# EAGLE board avr_saber.job (EAGLE 6.5.0)
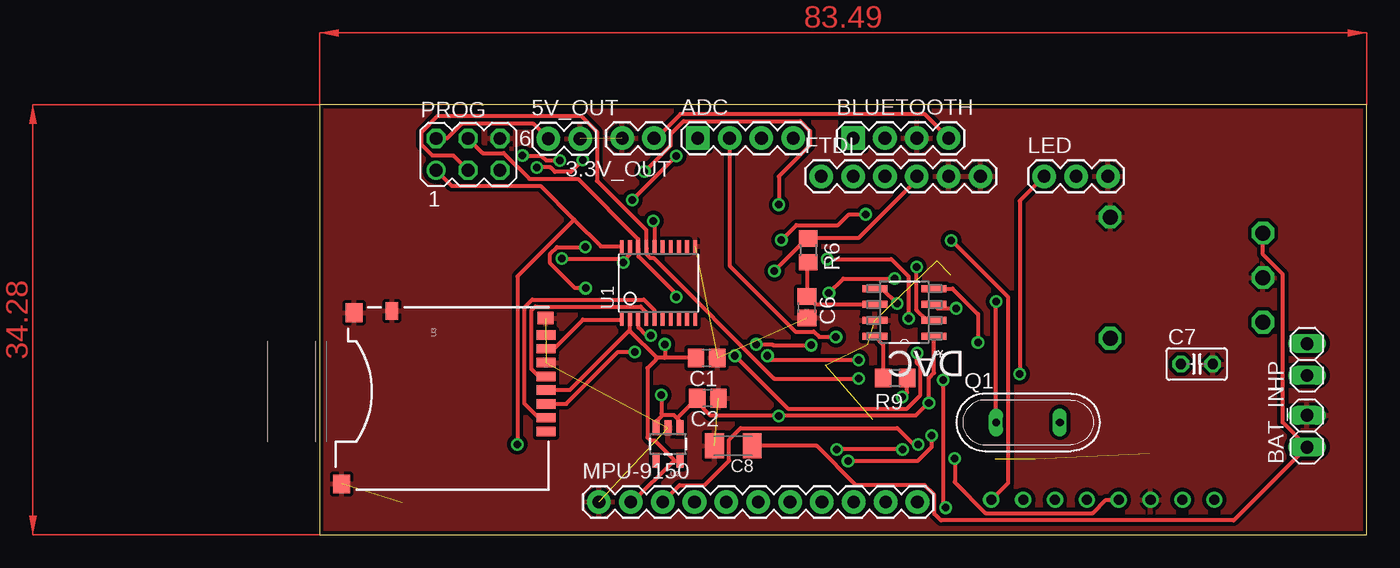
[diagram p0: board, top side]
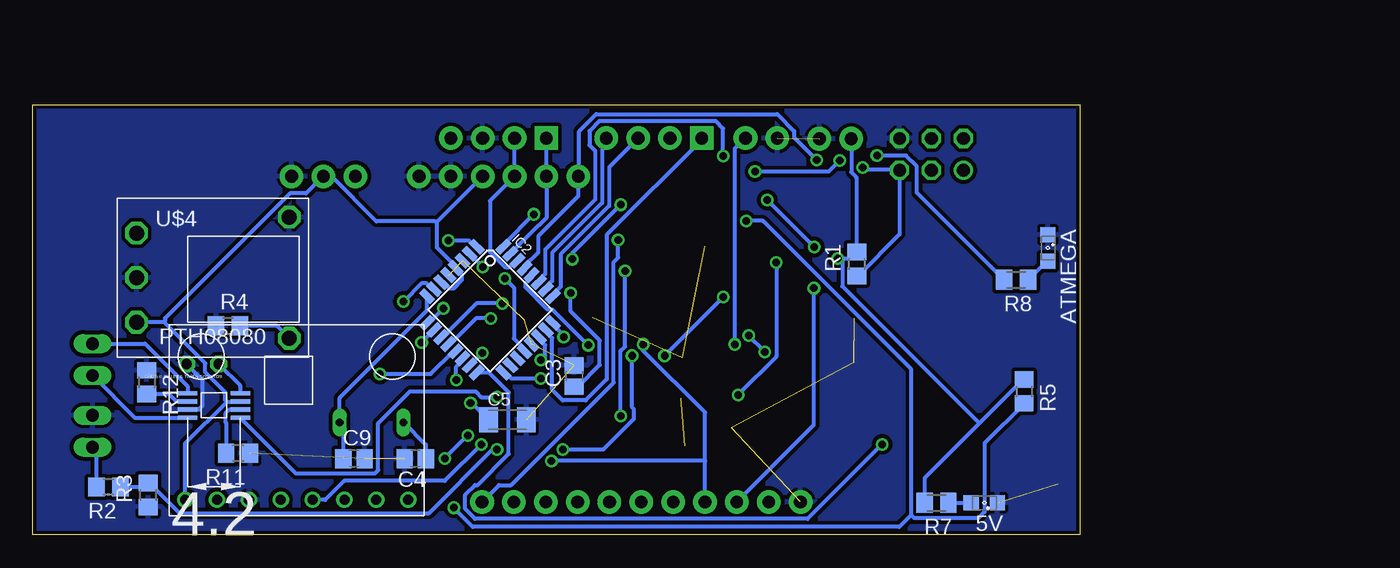
[diagram p1: board, bottom side, seen from below]

Size 83.49 x 34.28 mm. Coordinates in mm from the lower left corner, seen from the top.
Outline: 0,0 83.49,0 83.49,34.28 0,34.28 0,0
Copper layers (1*16): Top 0.035mm / dielectric 1.5mm / Bottom 0.035mm
Design rules "default *": minimum track width 12mil, minimum drill 0.6mm, track to track 10mil, track to pad 10mil, pad to pad 10mil, via to via 10mil, smd to smd 8mil, copper to edge 12mil, drill to drill 10mil, minimum pad ring 10mil, minimum via ring 8mil, stop-mask expansion 4mil, vias tented up to drill 0mil, thermal gap 10mil
Net classes: 1 power: width 0.508 mm
tKeepout: area 52.9,7.6 to 60.5,10.5

## Footprints (pad centres in the part's own frame; a part is rotated, then mirrored left to right if it is on the bottom)
1X02 = drill 1.016 pad 1.88: 1 0,0; 2 2.54,0
SML0805 = smd 1.2 x 1.2: A 1.05,0; C -1.05,0
1X04 = drill 1.016 pad 1.88 square: 1 0,0 | drill 1.016 pad 1.88: 2 2.54,0; 3 5.08,0; 4 7.62,0
1X02' = drill 1.016 long: 1 -1.27,0; 2 1.27,0
C0805 = smd 1.3 x 1.5: 1 -0.85,0; 2 0.85,0
C1206K = smd 1.5 x 2: 1 -1.5,0; 2 1.5,0
C025-025X050 = drill 0.813 octagon: 1 -1.27,0; 2 1.27,0
SOIC8-N_MC = smd 1.981 x 0.559: 1 -2.362,1.905; 2 -2.362,0.635; 3 -2.362,-0.635; 4 -2.362,-1.905; 5 2.362,-1.905; 6 2.362,-0.635; 7 2.362,0.635; 8 2.362,1.905
1X06 = drill 1.016 pad 1.88: 1 0,0; 2 2.54,0; 3 5.08,0; 4 7.62,0; 5 10.16,0; 6 12.7,0
TQFP32-08 = smd 1.27 x 0.559: 1 -4.293,2.8; 2 -4.293,2; 3 -4.293,1.2; 4 -4.293,0.4; 5 -4.293,-0.4; 6 -4.293,-1.2; 7 -4.293,-2; 8 -4.293,-2.8; 17 4.293,-2.8; 18 4.293,-2; 19 4.293,-1.2; 20 4.293,-0.4; 21 4.293,0.4; 22 4.293,1.2; 23 4.293,2; 24 4.293,2.8 | smd 0.559 x 1.27: 9 -2.8,-4.293; 10 -2,-4.293; 11 -1.2,-4.293; 12 -0.4,-4.293; 13 0.4,-4.293; 14 1.2,-4.293; 15 2,-4.293; 16 2.8,-4.293; 25 2.8,4.293; 26 2,4.293; 27 1.2,4.293; 28 0.4,4.293; 29 -0.4,4.293; 30 -1.2,4.293; 31 -2,4.293; 32 -2.8,4.293
1X03 = drill 1.016 pad 1.88: 1 0,0; 2 2.54,0; 3 5.08,0
MMA8451 = drill 0.8: 3.3V -7.62,6.35; GND -7.62,3.81; INT1 -7.62,-8.89; INT2 -7.62,-6.35; SA0 -7.62,-3.81; SCL -7.62,1.27; SDA -7.62,-1.27; VCC_IN -7.62,8.89
1X11 = drill 1.016 pad 1.88: 1 0,0; 2 2.54,0; 3 5.08,0; 4 7.62,0; 5 10.16,0; 6 12.7,0; 7 15.24,0; 8 17.78,0; 9 20.32,0; 10 22.86,0; 11 25.4,0
MA03-2 = drill 1.016: 1 -2.54,-1.27 | drill 1.016 octagon: 2 -2.54,1.27; 3 0,-1.27; 4 0,1.27; 5 2.54,-1.27; 6 2.54,1.27
QS = drill 0.61 long: 1 -2.54,0; 2 2.54,0
R0805 = smd 1.3 x 1.5: 1 -0.95,0; 2 0.95,0
M0805 = smd 1.3 x 1.6: 1 -0.95,0; 2 0.95,0
TSSOP20 = smd 0.305 x 0.991: 1 -2.925,-2.918; 2 -2.275,-2.918; 3 -1.625,-2.918; 4 -0.975,-2.918; 5 -0.325,-2.918; 6 0.325,-2.918; 7 0.975,-2.918; 8 1.625,-2.918; 9 2.275,-2.918; 10 2.925,-2.918; 11 2.925,2.918; 12 2.275,2.918; 13 1.625,2.918; 14 0.975,2.918; 15 0.325,2.918; 16 -0.325,2.918; 17 -0.975,2.918; 18 -1.625,2.918; 19 -2.275,2.918; 20 -2.925,2.918
SOT23-5 = smd 0.55 x 1.2: 1 -0.95,-1.3; 2 0,-1.3; 3 0.95,-1.3; 4 0.95,1.3; 5 -0.95,1.3
USD-SOCKET-PP = smd 0.75 x 1.5: 1 3.2,16.8; 2 2.1,16.8; 3 1,16.8; 4 -0.1,16.8; 5 -1.2,16.8; 6 -2.3,16.8; 7 -3.4,16.8; 8 -4.5,16.8 | smd 1 x 1.3: CD1 -5.85,16.75 | smd 1.4 x 1: CD2 -6.425,4.5 | smd 1.5 x 1.35: GND1 -6.275,1.475; GND2 7.375,0.475
TPA0211 = smd 1.55 x 0.35: BYPASS -2.1,-1.15; GND 2.1,0.15; IN -2.1,0.8; SE 2.1,-0.5; SHUTDOWN -2.1,0.15; VDD -2.1,-0.5; VO+ 2.1,-1.15; VO- 2.1,0.8
PTH08080EUF = drill 1.2 octagon: 1 0,0; 2 0,-3.556; 3 0,-7.112; 4 12.192,-8.382; 5 12.192,1.27

## Placement (x,y rotation side)
3.3V_OUT  M02PTH  [1X02]  26.67,31.62 180 top
5V  [SML0805]  7.62,2.54 180 bottom
5V_OUT  M02PTH  [1X02]  18.24,31.57 0 top
ADC  [1X04]  30.15,31.62 0 top
ATMEGA  [SML0805]  2.54,22.86 270 bottom
BAT_IN  [1X02']  78.74,8.26 90 top
BLUETOOTH  [1X04]  42.55,31.62 0 top
C1  22p  [C0805]  30.86,14.1 180 top
C2  22p  [C0805]  30.96,10.9 180 top
C3  0.1u  [C0805]  40.34,12.65 90 bottom
C4  22p  [C0805]  53.01,6.07 180 bottom
C5  [C1206K]  45.64,9.17 0 bottom
C6  0.1u  [C0805]  38.86,18.14 270 top
C7  [C025-025X050]  69.95,13.61 0 top
C8  [C1206K]  32.99,7.09 180 top
C9  22p  [C0805]  57.89,6.07 0 bottom
DAC  MCP4921-E/SN  [SOIC8-N_MC]  46.63,17.73 180 top
FTDI  [1X06]  40.01,28.57 0 top
HP  [1X02']  78.74,13.97 90 top
IC2  MEGA8-AI  [TQFP32-08]  47.04,17.96 315 bottom
LED  SMALL_SERVO  [1X03]  57.78,28.57 0 top
MMA8451  DEV  [MMA8451]  62.46,10.41 90 bottom
MPU-9150  Accelerometer  [1X11]  22.28,2.62 0 top
PROG  [MA03-2]  11.84,30.33 0 top
Q1  [QS]  56.49,8.97 0 top
R1  10k  [R0805]  17.78,21.59 90 bottom
R2  100k  [R0805]  77.47,3.81 180 bottom
R3  100k  [R0805]  74.3,3.17 90 bottom
R4  350  [R0805]  67.94,16.66 0 bottom
R5  10k  [R0805]  4.45,11.43 270 bottom
R6  100k  [R0805]  38.96,22.68 270 top
R7  1k  [M0805]  11.43,2.54 180 bottom
R8  1k  [M0805]  5.08,20.32 180 bottom
R9  1.5k  [R0805]  45.9,12.5 180 top
R11  [R0805]  67.13,6.5 180 bottom
R12  [R0805]  74.42,12.17 270 bottom
U1  [TSSOP20]  27.03,20.07 0 top
U2  [SOT23-5]  27.79,7.24 180 top
U3  USD-SOCKETUSD  [USD-SOCKET-PP]  1.27,11.43 270 top
U$1  TPA0211  [TPA0211]  69.06,10.13 180 bottom
U$4  PTH08080  [PTH08080EUF]  75.23,24.05 0 bottom

## Library data of the parts
3.3V_OUT 5V_OUT ADC BLUETOOTH FTDI MPU-9150 U3 = SparkFun-Connectors
5V ATMEGA = led
BAT_IN HP = pinhead
C1-C4 C6 C9 U1 = adafruit
C5 C7 C8 R1-R9 R11 R12 = rcl
DAC = Microchip_By_element14_Batch_1; DESCRIPTION: 12 Bit DAC; MPN: MCP4921-E/SN; OC_FARNELL: 1332113; OC_NEWARK: 08J8744; PACKAGE: SOIC-8; SUPPLIER: Microchip
IC2 = atmel; MPN: ATMEGA8-16AU; OC_FARNELL: 9171371; OC_NEWARK: 73M8863
LED = SparkFun-Electromechanical
MMA8451 = MMA8451_miniboard
PROG = con-lstb; OC_FARNELL: unknown; OC_NEWARK: unknown
Q1 = special
U2 = SparkFun-PowerIC; PROD_ID: VREG-00822
U$1 = TPA0211
U$4 = PTH08080

## Nets
+3V3: 3.3V_OUT.1 BLUETOOTH.4 C1.2 MPU-9150.2 U1.2 U2.5 U3.4
+5V: 5V_OUT.1 C2.2 C5.1 DAC.1 FTDI.4 IC2.4 IC2.6 LED.2 MMA8451.VCC_IN PROG.2 R1.2 R5.1 R6.1 R7.2 U1.19 U2.1 U2.3 U$1.VDD U$4.3
+12V: BAT_IN.1 C8.1 R2.2 U$4.1
ADC0: ADC.1 IC2.23
ADC1: ADC.2 IC2.24
ADC2: ADC.3 IC2.25
ADC3: ADC.4 IC2.26
AVCC: IC2.18
BATTLEVEL: IC2.22 R2.1 R3.2
DAC_CS: DAC.2 IC2.2
DAC_DI: DAC.4 IC2.10
DAC_LATCH: DAC.5 IC2.11
DAC_SCK: DAC.3 IC2.9
GND: 3.3V_OUT.2 5V.C 5V_OUT.2 ATMEGA.C BAT_IN.2 BLUETOOTH.3 C1.1 C2.1 C3.2 C4.2 C5.2 C6.2 C7.2 C8.2 C9.2 DAC.7 FTDI.5 FTDI.6 IC2.3 IC2.5 IC2.21 LED.3 MMA8451.GND MPU-9150.1 PROG.6 R3.1 R4.1 R11.1 R12.1 U1.11 U2.2 U3.6 U3.CD1 U3.CD2 U3.GND1 U3.GND2 U$1.GND U$4.2 U$4.5
INT0: IC2.32 MPU-9150.11
INT1: IC2.1 MMA8451.INT1
MISO: IC2.16 PROG.1 U1.20
MMC_CS: IC2.14 R5.2 U1.16
MOSI: IC2.15 PROG.4 U1.18
N$1: C9.1 IC2.8 Q1.2
N$2: C4.1 IC2.7 Q1.1
N$3: R9.1 U$1.IN
N$5: R4.2 U$4.4
N$6: U1.4 U3.5
N$7: U1.1 U3.7
N$8: C3.1 IC2.20
N$9: U1.5 U3.2
N$10: 5V.A R7.1
N$11: U1.3 U3.3
N$12: ATMEGA.A R8.1
N$13: IC2.12 R8.2
N$15: DAC.8 R9.2
N$19: C6.1 DAC.6 R6.2
N$20: IC2.13 LED.1
N$22: HP.1 U$1.VO-
N$23: C7.1 U$1.BYPASS
N$32: R11.2 U$1.SHUTDOWN
N$33: R12.2 U$1.SE
RST: FTDI.1 IC2.29 PROG.5 R1.1
RXI: BLUETOOTH.2 FTDI.3 IC2.30
SCK: IC2.17 PROG.3 U1.17
SCL: IC2.28 MMA8451.SCL MPU-9150.4
SDA: IC2.27 MMA8451.SDA MPU-9150.3
TXO: BLUETOOTH.1 FTDI.2 IC2.31
VO+: HP.2 U$1.VO+

## Tracks (layer width: path | path; a pad name or v marks a point on that pad's centre or on a via)
+3V3  (via drill 0.6)
  Top 0.305: 28.27,5.92 28.73,5.92 U2.5 | 28.27,5.92 24.97,2.62 MPU-9150.2 | 24.77,16.23 24.77,17.14 U1.2 | 26.9,14.1 24.77,16.23 | C1.2 27.53,14.1 | 27.53,14.1 26.9,14.1 | U3.4 18.09,11.53 19.94,11.53 24.64,16.23 24.77,16.23 | 28.27,5.92 28.19,6.04 26.72,7.52 26.39,7.52 26.14,7.77 26.14,13.28 26.82,13.97 26.9,14.1 | 3.3V_OUT.1 26.87,31.62 28.78,33.53 48.26,33.53 BLUETOOTH.4 | v27.53,15.19 27.53,14.1
  Bottom 0.305: v27.53,15.19 27.53,30.76 3.3V_OUT.1
+5V  (via drill 0.6)
  Top 0.305: FTDI.4 47.62,28.32 42.95,23.65 38.96,23.65 R6.1 38.84,23.55 38.79,23.55 v36.27,21.03 | 27.33,9.55 26.85,9.07 26.85,8.56 U2.3 | 27.33,9.55 28.25,9.55 28.5,9.3 | 28.5,9.3 28.73,9.07 28.73,8.56 U2.1 | 28.5,9.3 C2.2 30.05,10.64 31.19,9.5 36.63,9.5 | DAC.1 49,12.9 48.59,12.5 v48.59,10.52 48.46,10.44 47.52,9.5 36.63,9.5 | v19.3,22.02 24.21,22.02 | 24.21,22.02 24.38,22.02 24.74,22.38 24.74,22.96 U1.19 | PROG.2 10.16,31.6 11.33,32.77 17.04,32.77 5V_OUT.1 | v27.25,11.15 27.25,9.68 27.33,9.55 | 24.21,22.02 v24.21,21.72 | v36.63,9.47 36.63,9.5
  Bottom 0.305: 68.02,10.62 66.98,10.62 U$1.VDD | 68.02,10.62 71.35,7.29 MMA8451.VCC_IN | 73.03,16.94 U$4.3 | 73.03,16.94 69.75,13.66 69.75,12.95 68.15,11.35 68.15,10.69 68.02,10.62 | IC2.6 50.9,20.14 50.77,20.14 50.27,19.63 49.96,19.63 49.3,20.3 49.3,20.78 49.78,21.26 IC2.4 49.81,21.44 51.28,22.91 51.28,24.92 | FTDI.4 51.28,24.92 | 51.28,24.92 51.41,24.99 56.11,24.99 59.69,28.57 LED.2 60.45,28.5 61.72,27.23 62.99,27.23 72.95,17.27 72.95,17.07 73.03,16.94 | v48.59,10.52 48.51,10.52 47.17,9.17 C5.1 | 8.03,8.89 12.37,4.55 R7.2 | 8.03,8.89 4.55,12.37 R5.1 | 5V_OUT.1 18.24,28.91 17.83,28.5 17.83,22.68 R1.2 18.29,22.02 v19.3,22.02 18.95,21.89 18.95,19.81 8.03,8.89 | v27.25,11.15 24.21,14.2 v24.21,21.72 | v36.27,21.03 36.27,15.01 36.63,14.66 v36.63,9.47
+12V
  Top 0.305: C8.1 39.65,7.09 42.77,3.96 48.23,3.96 49.02,3.17 49.02,1.68 49.55,1.14 72.9,1.14 BAT_IN.1 78.66,7.11 76.81,8.97 76.81,20.78 75.23,22.35 U$4.1
  Bottom 0.305: BAT_IN.1 78.44,6.68 78.44,3.81 R2.2
ADC0
  Bottom 0.305: ADC.1 30.15,31.5 37.74,23.9 37.74,12.39 39.42,10.72 41.25,10.72 42.09,11.56 42.09,15.67 42.57,16.15 42.57,16.33 IC2.23
ADC1  (via drill 0.6)
  Top 0.305: v41.17,15.77 39.85,15.77 39.42,16.2 37.95,16.2 32.69,21.46 ADC.2
  Bottom 0.305: v41.17,15.77 41.17,15.9 42.01,16.74 42.01,16.89 IC2.24
ADC2
  Bottom 0.305: ADC.3 37.54,29.31 37.54,26.21 41.4,22.35 41.4,19.79 42.01,19.18 42.01,19.02 IC2.25
ADC3
  Bottom 0.305: ADC.4 38.1,31.29 38.1,26.47 42.09,22.48 42.09,20.24 42.57,19.76 42.57,19.58 IC2.26
BATTLEVEL  (via drill 0.6)
  Top 0.305: v43,13.95 36.04,13.95 v35.71,14.28 | v46.48,6.81 v41.22,6.81
  Bottom 0.305: v43,13.95 42.65,14.3 42.65,15.11 43.16,15.62 43.16,15.75 IC2.22 | v35.71,14.28 35.71,10.16 35.56,10.01 35.56,9.25 38,6.81 v41.22,6.81 | v46.48,6.81 46.84,6.81 51.92,1.73 71.81,1.73 74.19,4.12 R3.2 74.42,4.04 74.65,3.81 R2.1
DAC_CS  (via drill 0.6)
  Top 0.305: v47.6,21.36 47.6,17.91 48.41,17.09 DAC.2
  Bottom 0.305: v47.6,21.36 48.64,22.4 IC2.2
DAC_DI  (via drill 0.6)
  Top 0.305: v52.5,15.34 52.5,17.6 50.47,19.63 DAC.4
  Bottom 0.305: v52.5,15.34 51.51,16.33 IC2.10
DAC_LATCH  (via drill 0.6)
  Top 0.305: v46.05,18.44 44.86,19.63 DAC.5
  Bottom 0.305: v46.05,18.44 48.11,18.44 50.77,15.77 50.9,15.77 IC2.11
DAC_SCK  (via drill 0.6)
  Top 0.305: v50.75,18.06 49.3,18.06 DAC.3
  Bottom 0.305: v50.75,18.06 51.89,16.92 52.05,16.92 IC2.9
GND  (15 unrouted)
  Bottom 0.305: C7.2 69.98,12.37 69.98,10.29 70.26,10.01 71.14,10.01 U$1.GND
  pour Top (isolate 0.305): 0.2,34.34 83.31,34.34 83.31,-0.2 0.2,-0.2
  pour Bottom (isolate 0.305): 0.2,34.34 83.31,34.34 83.31,-0.2 0.2,-0.2
INT0  (via drill 0.6)
  Top 0.305: v43.56,25.55 42.22,25.55 41.35,24.69 38.02,24.69 v36.83,23.5
  Bottom 0.305: v43.56,25.55 45.97,23.14 45.97,22.99 IC2.32 | v36.83,23.5 36.83,22.1 37.19,21.74 37.19,12.14 45.36,3.96 46.33,3.96 MPU-9150.11
INT1  (via drill 0.6)
  Top 0.305: v50.37,23.47 54.91,18.92 54.91,4.14 MMA8451.INT1
  Bottom 0.305: v50.37,23.47 48.74,23.47 48.26,22.99 48.11,22.99 IC2.1
MISO  (via drill 0.6)
  Top 0.305: 20.3,25.12 17.6,27.81 10.54,27.81 PROG.1 | 20.3,25.12 22.43,22.99 24.08,22.99 U1.20 | v15.77,7.21 15.77,20.6 20.3,25.12
  Bottom 0.305: v15.77,7.21 21.72,1.27 48.23,1.27 49.02,2.06 49.02,3.17 48.23,3.96 48.03,3.96 45.54,6.45 45.54,11.35 47.12,12.93 48.08,12.93 IC2.16
MMC_CS  (via drill 0.6)
  Top 0.305: v26.62,25.02 26.7,24.94 U1.16 | v49.73,12.34 49.73,2.36 v49.94,2.16
  Bottom 0.305: v26.62,25.02 25.27,25.02 13.44,13.18 13.44,1.55 | 13.44,1.55 13.21,1.32 8.1,1.32 7.59,1.83 7.59,7.32 4.45,10.46 R5.2 | v49.73,12.34 49.73,13.41 49.25,13.89 49.25,14.07 IC2.14 | v49.94,2.16 48.41,0.64 14.4,0.64 13.56,1.47 13.44,1.55
MOSI  (via drill 0.6)
  Top 0.305: PROG.4 13.01,30.43 14.68,30.43 16.74,28.37 20.6,28.37 25.4,23.57 U1.18 25.43,22.84 25.43,22.2 28.45,19.18 v28.45,18.95 | v47.65,14.5 47.65,13.69 47.9,13.44 47.9,11.12 46.84,10.06 37.34,10.06 v33.12,14.28
  Bottom 0.305: v47.65,14.5 48.64,13.51 IC2.15 | v28.45,18.95 v33.12,14.28
N$1
  Bottom 0.305: IC2.8 52.07,19 52.07,17.88 59.03,10.92 Q1.2 58.95,8.84 58.75,8.64 C9.1
N$2  (via drill 0.6)
  Top 0.305: Q1.1 v53.95,18.59
  Bottom 0.305: v53.95,18.59 52.45,20.09 52.15,20.09 51.64,19.58 51.51,19.58 IC2.7 | Q1.1 52.17,7.19 52.17,6.07 C4.1
N$3  (via drill 0.6)
  Top 0.305: v46.46,10.97 46.84,11.35 46.84,12.5 R9.1
  Bottom 0.305: v46.46,10.97 47.75,10.97 48.21,11.43 53.42,11.43 55.96,8.89 55.96,5.16 56.21,4.9 62.53,4.9 U$1.IN
N$5
  Bottom 0.305: R4.2 64.03,16.66 U$4.4
N$6
  Top 0.305: U1.4 26.04,17.17 26.04,17.75 25.6,18.19 17.2,18.19 16.89,17.88 16.89,13.21 17.45,12.65 18.06,12.65 U3.5
N$7
  Top 0.305: U1.1 24.08,17.14 21.01,17.14 18.69,14.83 18.09,14.83 U3.7
N$8  (via drill 0.6)
  Top 0.305: v45.85,20.42 41.76,20.42 v40.62,19.28
  Bottom 0.305: v45.85,20.42 45.14,19.71 45.14,15.65 44.3,14.81 44.3,14.66 IC2.20 | v40.62,19.28 40.62,17.8 38.3,15.49 38.3,13.54 40.03,11.81 C3.1
N$9
  Top 0.305: U1.5 26.7,17.17 26.7,17.91 25.86,18.75 16.94,18.75 16.33,18.14 16.33,10.46 17.45,9.35 18.06,9.35 U3.2
N$10
  Bottom 0.305: R7.1 5V.A
N$11  (via drill 0.6)
  Top 0.305: v26.42,15.88 26.09,15.88 25.43,16.54 25.43,17.14 U1.3 | v25.12,14.58 23.8,14.58 19.66,10.44 18.09,10.44 U3.3
  Bottom 0.305: v25.12,14.58 v26.42,15.88
N$12
  Bottom 0.305: ATMEGA.A 2.54,21.79 2.64,21.79 4.12,20.32 R8.1
N$13  (via drill 0.6)
  Top 0.305: v46.97,17.25 46.97,20.6 45.59,21.97 v40.49,21.97 | v36.63,26.31 36.63,28.57 39.12,31.06 39.12,32.18 38.33,32.97 29.03,32.97 28.02,31.95 28.02,31.06 v25.91,28.96 | v19.15,29.84 18.06,29.84 17.68,30.23 v16.18,30.23
  Bottom 0.305: v46.97,17.25 48.16,17.25 50.19,15.21 50.34,15.21 IC2.12 | v40.49,21.97 40.49,22.45 v36.63,26.31 | v25.91,28.96 20.04,28.96 v19.15,29.84 | v16.18,30.23 13.87,30.23 13.01,29.36 13.01,27.28 6.04,20.32 R8.2
N$15
  Top 0.305: DAC.8 44.93,15.16 44.93,12.5 R9.2
N$19
  Top 0.305: R6.2 38.96,21.72 38.86,21.61 C6.1 38.99,18.9 39.52,18.36 DAC.6
N$20  (via drill 0.6)
  Top 0.305: v55.83,12.83 55.83,26.62 LED.1
  Bottom 0.305: v55.83,12.83 51.77,12.83 49.96,14.63 49.81,14.63 IC2.13
N$22
  Bottom 0.305: HP.1 75.39,9.35 71.17,9.35 U$1.VO-
N$23
  Bottom 0.305: C7.1 66.98,11.91 66.98,11.3 U$1.BYPASS
N$32
  Bottom 0.305: R11.2 68.1,6.5 68.1,8.94 68.15,8.99 68.15,9.68 67.84,9.98 66.98,9.98 U$1.SHUTDOWN
N$33
  Bottom 0.305: R12.2 74.42,11.2 72.62,11.2 72.06,10.64 71.17,10.64 U$1.SE
RST  (via drill 0.6)
  Top 0.305: v17.32,29.29 18.41,29.29 18.77,28.93 20.04,28.93 v20.98,29.87
  Bottom 0.305: R1.1 17.68,20.65 14.38,23.95 PROG.5 14.5,29.13 17.17,29.13 v17.32,29.29 | IC2.29 44.27,21.29 44.27,21.44 43.2,22.5 43.2,23.8 40.01,27 FTDI.1 39.93,28.7 39.93,32.18 38.58,33.53 24.13,33.53 22.78,32.18 22.78,31.67 v20.98,29.87
RXI
  Bottom 0.305: IC2.30 44.86,21.82 45.03,21.82 45.52,21.34 45.82,21.34 47.04,22.55 47.04,26.62 FTDI.3 BLUETOOTH.2
SCK  (via drill 0.6)
  Top 0.305: PROG.3 10.67,30.23 8.99,30.23 8.13,31.09 8.13,32.11 9.42,33.4 20.85,33.4 22.12,32.13 22.12,28.22 26.04,24.31 26.04,22.99 U1.17 26.09,22.84 26.09,22.35 26.36,22.07 26.62,22.07 36.25,12.45 v43,12.45
  Bottom 0.305: v43,12.45 45.34,12.45 45.82,12.93 45.97,12.93 IC2.17
SCL  (via drill 0.6)
  Top 0.305: v39.22,15.11 36.17,15.11 36.09,15.19 v34.82,15.19 | MMA8451.SCL 62.71,2.79 61.65,1.73 53.11,1.73 50.65,4.19 v50.65,6.1 | v48.82,7.92 48.82,7.01 47.7,5.89 v42.14,5.89
  Bottom 0.305: v39.22,15.11 42.06,17.96 42.44,17.96 44.22,19.74 44.22,20.07 43.74,20.55 43.74,20.7 IC2.28 | v34.82,15.19 34.82,14.68 29.9,9.75 29.9,5.89 | MPU-9150.4 29.9,5.89 | v48.82,7.92 v50.65,6.1 | 29.9,5.89 v42.14,5.89
SDA  (via drill 0.6)
  Top 0.305: v24.94,26.7 v28.45,30.2 | v21.18,22.94 18.92,22.94 18.39,22.4 18.39,21.64 20.37,19.66 v21.21,19.66 | v47.73,7.21 47.37,7.21 46.08,8.51 33.58,8.51 32.66,7.59 32.66,5.92 30.71,3.96 28.7,3.96 MPU-9150.3
  Bottom 0.305: v28.45,30.2 28.45,32.38 29.03,32.97 38.33,32.97 39.12,32.18 39.12,31.06 38.66,30.61 38.66,26.72 42.65,22.73 42.65,20.8 43.16,20.3 43.16,20.17 IC2.27 | v21.18,22.94 v24.94,26.7 | v21.21,19.66 21.21,8.76 MPU-9150.3 | MMA8451.SDA 60.17,2.79 58.67,4.29 50.65,4.29 v47.73,7.21
TXO
  Bottom 0.305: IC2.31 45.41,22.43 43.2,24.64 43.18,24.64 42.55,25.27 FTDI.2 BLUETOOTH.1
VO+
  Bottom 0.305: HP.2 74.55,15.24 71.17,11.86 71.17,11.3 U$1.VO+
(copper drawn outside any net)
  shapes: Top area x2